# Altium PCB XL6009.PcbDoc
Units mil, origin at the board's own origin, x right, y up, seen from the top; angles counter-clockwise.
Board outline 3955 x 1950 mil, 2 copper layers (Top Layer, Bottom Layer); 13 components, 5 nets, 26 pads, 2 vias.
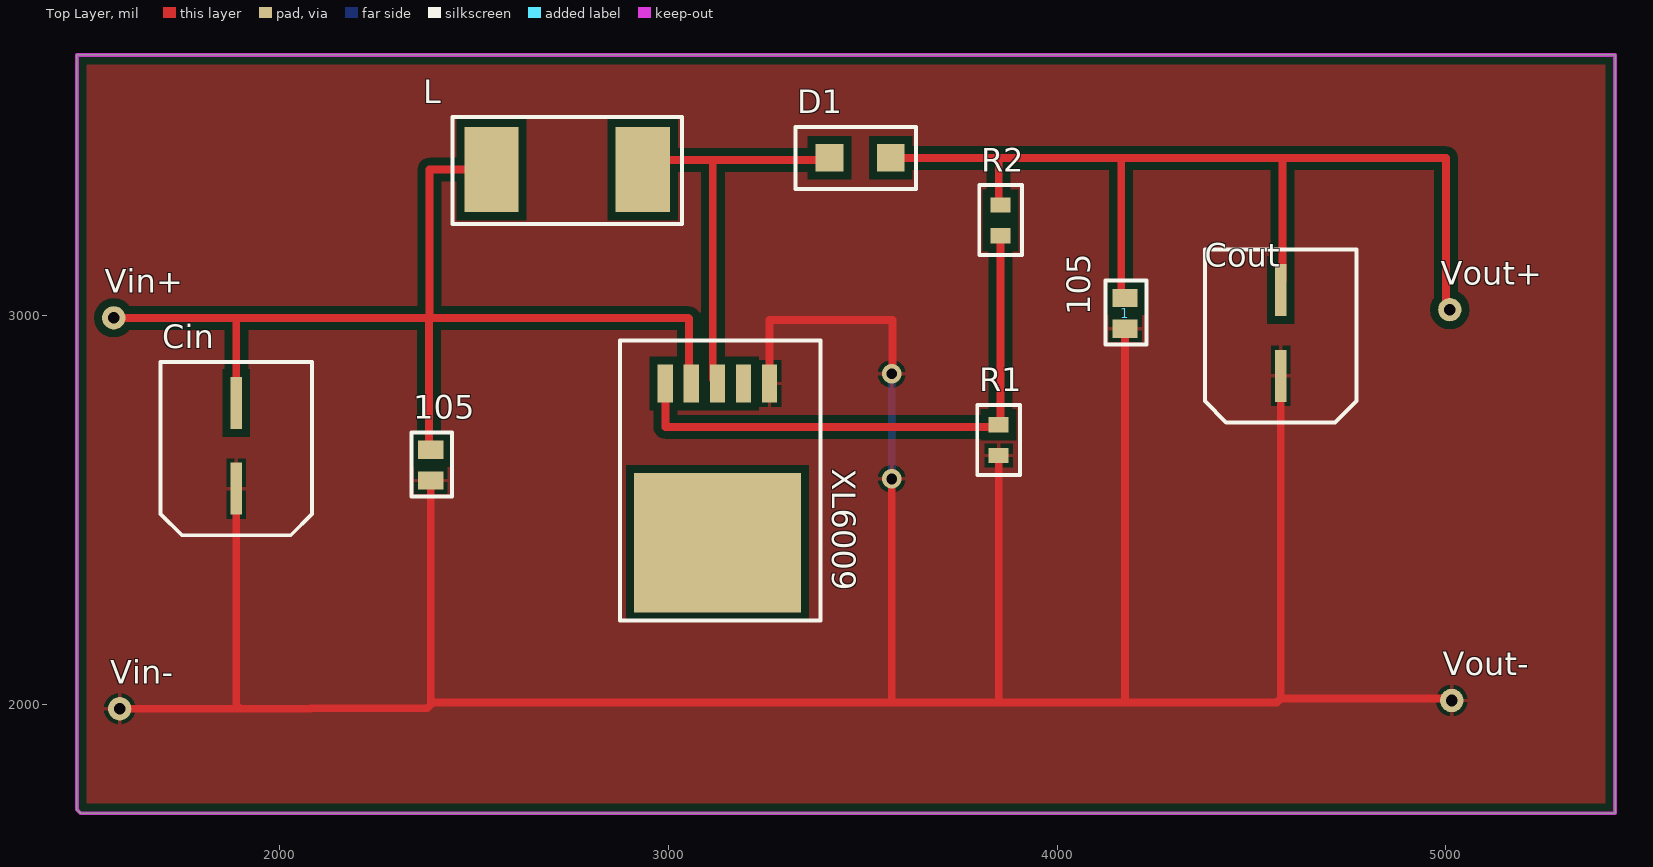
[diagram p0: Top Layer view]
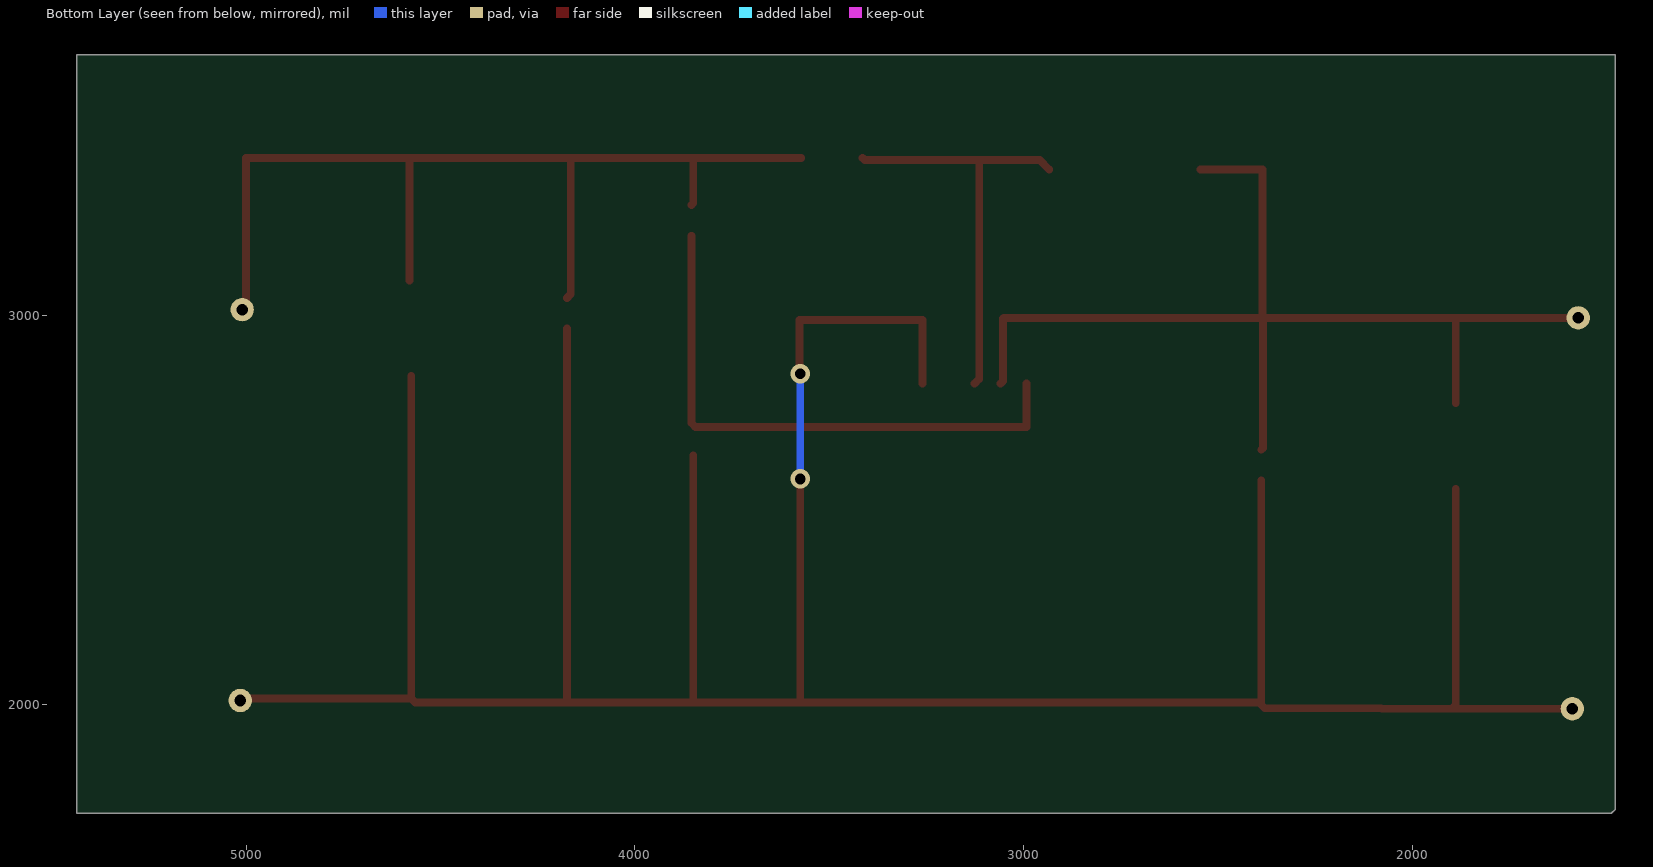
[diagram p1: Bottom Layer view, seen from below]
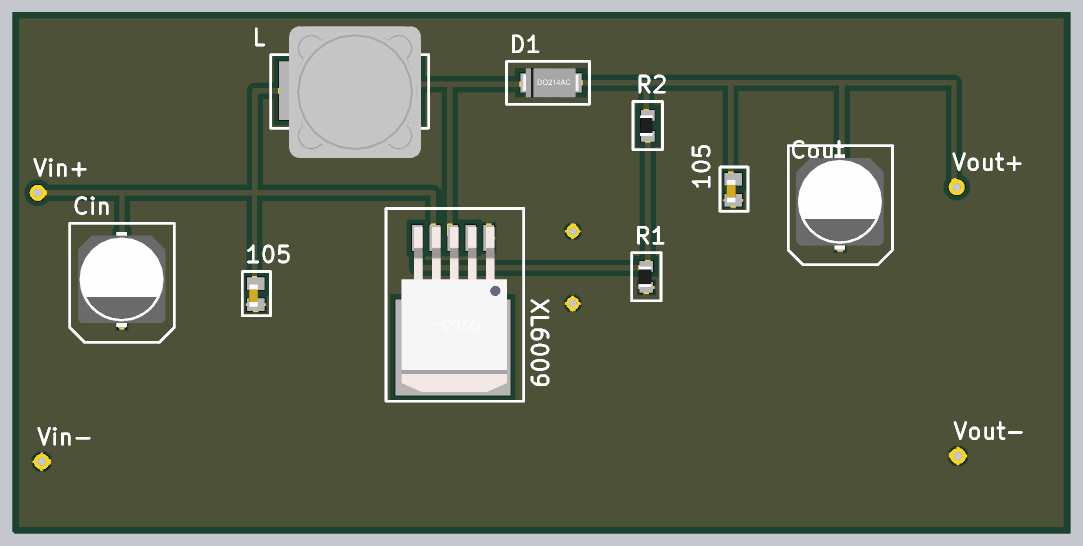
[diagram p2: 3D render of the assembled board from above, using the file's embedded part models]

## Layer stack, top to bottom
Top Solder: solder mask 0.4, Solder Resist, Dk 3.5
Top Layer: signal copper 1.4
Dielectric 1: dielectric 12.6, FR-4, Dk 4.8
Bottom Layer: signal copper 1.4
Bottom Solder: solder mask 0.4, Solder Resist, Dk 3.5

## Board outline
1490,1720 1480,1730 1480,3670 5435,3670 5435,1720
cut-out: 6705,2855

## Design rules (kind name [scope] priority, off if disabled: settings)
Clearance [All] p1: gap=20 ignorepadtopadclearanceinfootprint=FALSE except(0: Arc-Hole Track-Hole SMDPad-Hole THPad-Hole Via-Hole Fill-Hole Poly-Hole Region-Hole Text-Hole)
PolygonConnect [All] p1: connectstyle=Relief reliefconductorwidth=10 reliefentries=4 polygonreliefangle="90 Angle" airgapwidth=10
RoutingVias [All] p1: holewidth=28 width=50 viastyle="Through Hole" minholewidth=28 minwidth=50 maxholewidth=28 maxwidth=50
SolderMaskExpansion [All] p1: expansion=4
Width [All] p1: maxlimit=25 minlimit=20 preferedwidth=20
30 further rules are at their usual default settings.

## Components (designator, comment, footprint, x,y, rotation, side; value= is the part's Value field where it differs from the comment)
1 "105" PCBComponent_1#1 4175,3045 r90 top
105 "105" PCBComponent_1#1 2390,2654.53 r90 top
Cin "47uF/50V" PCBComponent_1#2 1885,2695 r0 top
Cout "220uF/50V" PCBComponent_1#2 4570,2985 r0 top
D1 "1N5824" 1N5824 3572.48,3405 r270 top
L "33uH/50V" PCBComponent_1#3 2546.02,3375 r0 top
R1 "1k Ohm" PCBComponent_1#4 3850,2640 r180 top
R2 "13,8k Ohm" PCBComponent_1#4 3855,3205 r180 top
Vin+ "p1" P1 1575,2993.74 r90 top
Vin- "p1" P1 1590,1988.74 r90 top
Vout+ "p1" P1 5010,3015 r90 top
Vout- "p1" P1 5015,2010 r90 top
XL6009 "XL6009" XL6009 3126.93,2435.24 r270 top

## Footprints (in the part's own frame and the unit in brackets; to place one, negate y for a bottom-side part, rotate by r counter-clockwise, add the part's x,y. Pads: shape width x height; smd on the part's side, far side on the other; paste and mask are expansions set on the pad)
1N5824 [mm]
  rect 1.8x1.8 smd: 1(0,0) 2(0,-4)
  silkscreen extent -2.03,-6.22 2.03,1.65, body extent -1.4,-4.78 1.4,0.71, height 1.96
P1 [mil]
  round 60 hole 30: 21(0,0)
PCBComponent_1#1 [mm]
  rect 1.2x1.65 smd: 1(0,0) 2(-2,0)
  silkscreen extent -3.05,-1.4 1.14,1.27, body extent -9.14,-11.68 0.63,1.4, height 1.46
PCBComponent_1#2 [mm]
  rect 0.75x3.4 smd: 1(0.127,2.032) 2(0.127,-3.568)
  silkscreen extent -4.83,-6.6 5.08,4.7, body extent -4.06,-5.13 4.24,3.86, height 6.9
PCBComponent_1#3 [mm]
  rect 3.53x5.57 smd: 1(0,0) 2(9.88,0)
  silkscreen extent -2.54,-3.56 12.45,3.43, body extent -0.79,-6.38 11.71,6.12, height 7.5
PCBComponent_1#4 [mm]
  rect 1.3x1 smd: 1(0,0) 2(0,-2)
  silkscreen extent -1.4,-3.3 1.4,1.27, body extent -0.5,-2.02 0.75,-0.02, height 0.8
XL6009 [mm]
  rect 2.5x1 smd: 1(-9.9,3.4) 2(-9.9,1.7) 3(-9.9,0) 4(-9.9,-1.7) 5(-9.9,-3.4)
  rect 9.1x10.9 smd: 6(0.5,0)
  silkscreen extent -12.7,-6.35 5.59,6.73, body extent -10.96,-4.87 4.71,5.13, height 4.78

## Part data
Cin Cout: library part capacitor
D1: library part diode
L: library part "Electrolytic Cap"
R1 R2: library part resistor

## Via types
v1: diameter 50, hole 28, Top Layer to Bottom Layer, 2 vias

## Nets (pads, with @x,y where several pads share a name; then routed paths per layer and width w, separated by ;. In a path a pad name is that pad's centre, name@x,y a point inside that pad or via, vN(x,y) a via of type N, cw(c..) or ccw(c..) an arc to the next point about the centre after c; other vN are vias at no path point)
GND: 1.2 105.2 Cin.2 Cout.2 R1.1 Vin-.21 Vout-.21 XL6009.1 | length 8473
  Top Layer w20: Vin-.21 1900,1988.74 ; Cin.2 1890,1998.74 1900,1988.74 ; 105.2 2390,1999.53 ; XL6009.1 3260.79,2988.05 3576.95,2988.05 3576.95,2851.95 v1(3575,2850) ; v1(3575,2580) 3575,2005 ; R1.1 3850,2005 ; 1.2 4175,2005 ; Cout.2 4575,2015 ; Vout-.21 5010,2015 4575,2015 ; 1900,1988.74 2080,1988.74 2081.57,1990.32 2380.79,1990.32 2390,1999.53 ; 2390,1999.53 2395.47,2005 3575,2005 ; 3575,2005 3850,2005 ; 3850,2005 4175,2005 ; 4175,2005 4565,2005 4575,2015
  Bottom Layer w20: v1(3575,2580) v1(3575,2850)
Net1_1: 1.1 Cout.1 D1.1 R2.2 Vout+.21 | length 2624.1
  Top Layer w20: D1.1 3850,3405 ; R2.2 3850,3288.74 3850,3405 ; 1.1 4165,3055 4165,3405 ; Cout.1@4580,3090 4580,3405 ; Vout+.21 5000,3025 5000,3405 4580,3405 ; 3850,3405 4165,3405 ; 4165,3405 4580,3405
Net105_1: 105.1 Cin.1 L.1 Vin+.21 XL6009.4 | length 2751.5
  Top Layer w20: Vin+.21 1895,2993.74 ; Cin.1 1890,2988.74 1895,2993.74 ; 105.1 2385.32,2659.21 2385.32,2993.74 ; L.1 2386.79,3375 2386.79,2993.74 ; XL6009.4 3053.52,2831.48 3053.52,2992.26 3052.05,2993.74 2386.79,2993.74 ; 1895,2993.74 2385.32,2993.74 ; 2385.32,2993.74 2386.79,2993.74
NetD1_2: D1.2 L.2 XL6009.3 | length 1071.9
  Top Layer w20: L.2 2959.53,3399.53 3115,3399.53 ; XL6009.3 3115,2836.93 3115,3399.53 ; D1.2 3409.53,3399.53 3115,3399.53
NetR1_2: R1.2 R2.1 XL6009.5 | length 1459.5
  Top Layer w20: XL6009.5 2993.07,2713.07 3844.33,2713.07 R1.2 3855,2723.74 R2.1
pads on no net: XL6009.2 XL6009.6

## Polygon pours and split planes (outlines as drawn)
GND on Top Layer (solid, pour order 6): 1490,3660 5410,3660 5420,3670 5430,3660 5430,1710 1480,1710 1480,3670

## Keep-outs
Top Layer:
  the board outline again, w10